# Allegro board nrf9160_0708.brd
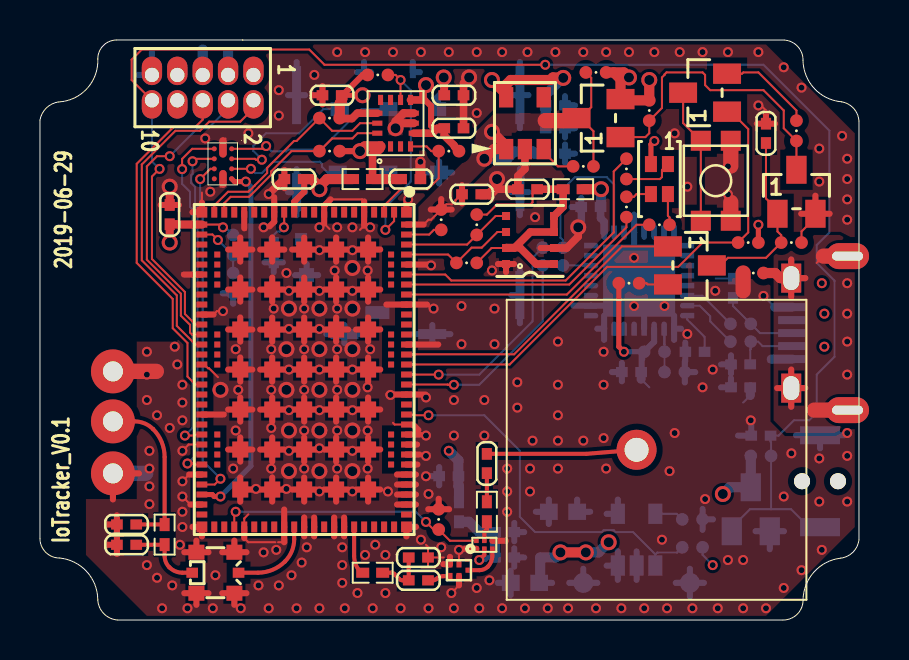
[diagram p0: board, top side]
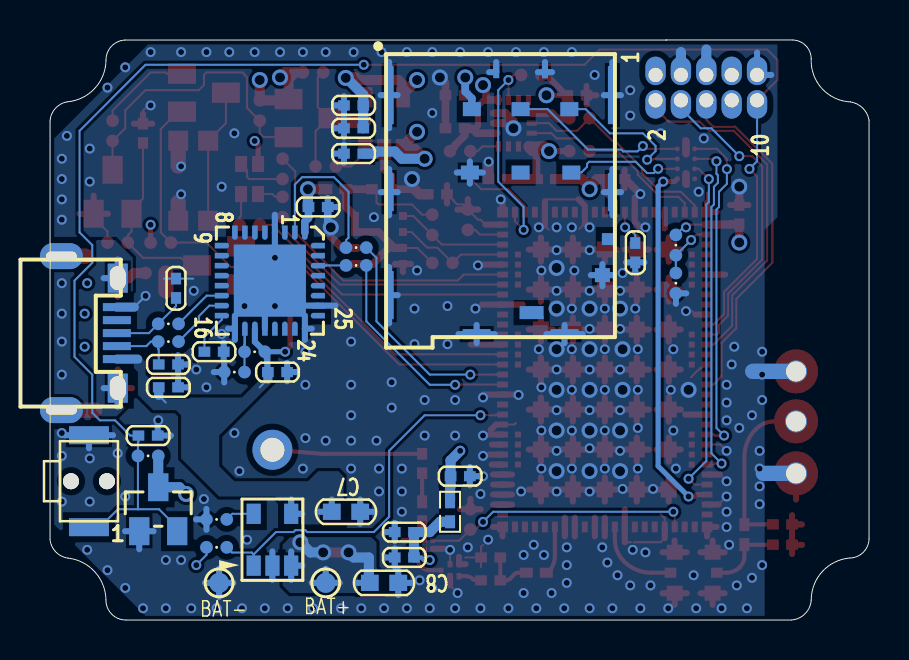
[diagram p1: board, bottom side, seen from below]

Outline 40.99 x 29 mm; copper layers: TOP, L2GND, L3PWR, BOTTOM. Coordinates in mm from the lower left corner of the outline.
Outline path: 0,24.99 0,4.08 arc(0.29,3.39) 0.98,3.1 arc(2.34,2.42) 2.89,1 arc(3.2,0.32) 3.88,0 37.19,0 arc(37.9,0.29) 38.19,1.01 arc(38.75,2.4) 40.08,3.09 arc(40.7,3.39) 40.99,4.01 40.99,24.95 arc(40.73,25.59) 40.12,25.91 arc(38.76,26.58) 38.19,27.99 arc(37.92,28.68) 37.25,29 10.15,29 10.15,29 3.84,29 arc(3.17,28.73) 2.9,28.06 arc(2.36,26.57) 0.92,25.91 arc(0.31,25.6) 0,24.99

## Design rules (mm)
net group LED_B: nets LED_B N97235328
net group LED_G: nets LED_G N97235326
net group LED_R: nets LED_R N97235316
net group N97220212: nets N97220212 N97220790
net group N97221138: nets N97221138 N97221234

## Placement (name value [footprint] x y rotation side)
ANT1  -  [GPS-15X15X2]  29.86 8.51 90 top
BAT+1  TP  [TP_SMD___0MM]  27.2 1.86 180 bottom
BAT-1  TP  [TP_SMD___0MM]  32.53 1.86 180 bottom
C1  1uF  [C0402]  27.58 20.65 180 bottom
C2  1uF  [C0402]  32.78 13.41 180 bottom
C3  4.7uF  [C0402]  25.8 23.32 0 bottom
C4  33nF  [C0402]  25.8 24.59 0 bottom
C5  4.7uF  [C0402]  25.8 25.73 0 bottom
C6  4.7uF  [C0402]  36.34 24.34 90 top
C7  10uF  [C0603]  26.18 5.41 180 bottom
C8  10uF  [C0603]  24.27 1.86 180 bottom
C9  100pF  [C0402]  20.46 7.19 180 bottom
C10  1uF  [C0402]  23.26 4.4 0 bottom
C11  33nF  [C0402]  23.26 3.13 0 bottom
C12  4.7uF  [C0402]  21.61 21.29 0 top
C13  47pF  [C0402]  18.94 1.98 0 top
C14  47pF  [C0402]  22.37 7.83 90 top
C15  2.2pF  [C0402]  18.94 3.13 0 top
C16  4.7uF  [C0402]  12.72 22.05 180 top
C17  4.7uF  [C0402]  11.7 18.37 270 bottom
C18  NC  [C0402]  4.34 3.76 180 top
C19  NC  [C0402]  4.34 4.78 180 top
C20  4.7uF  [C0402]  6.49 20.27 90 top
C21  10nF  [C0402]  20.72 26.24 0 top
C22  100nF  [C0402]  24.4 21.54 180 top
C23  2.2uF  [C0402]  14.62 26.24 180 top
C24  10nF  [C0402]  20.72 24.59 0 top
C25  100nF  [C0402]  18.56 22.05 0 top
C26  1uF  [C0402]  29.61 12.4 180 bottom
C27  100pF  [C0402]  35.07 11.64 180 bottom
D1  BAT54C  [SOT-23]  32.53 17.73 270 top
D2  BAT54C  [SOT-23]  33.29 26.37 90 top
D3  RGB-0603  [LED4_1P6X1P5MM_SMT]  31.01 22.05 0 top
D4  -  [CM1402]  9.16 22.81 270 top
DVI1  -  [DVI]  3.65 9.93 0 top
DVI2  -  [DVI]  3.65 12.43 0 top
DVI3  -  [DVI]  3.65 7.33 0 top
J1  micro  [MICROUSB_5P_4DIP]  40.42 14.35 270 bottom
J2  -  [SF72S006VBAR2500]  24.02 28.15 0 bottom
J3  HDR 2X5  [HDR_5X2_FTSH_TH]  10.69 27.26 270 top
J4  MM8130-2600  [COAXIAL-SWF]  8.78 2.36 270 top
L1  100M/600R  [L0402]  20.97 5.41 270 bottom
L2  9.1nH  [L0402]  16.65 2.36 0 top
L3  6.8nH  [L0402]  22.37 5.41 90 top
L4  1.5nH  [L0402]  6.24 4.27 90 top
L5  100M/600R  [L0402]  26.69 21.54 0 top
L6  100M/600R  [L0402]  16.15 22.05 0 top
Q1  AO3401  [SOT-23]  27.96 25.1 90 top
Q2  AO3400  [SOT-23]  37.86 21.41 0 top
R1  0  [RC0402_25]  35.7 17.35 180 top
R2  10K  [RC0402_25]  31.77 12.4 0 bottom
R3  4.7K  [RC0402_25]  30.75 13.41 0 bottom
R4  33  [RC0402_25]  25.67 17.73 180 bottom
R5  33  [RC0402_25]  25.67 18.62 180 bottom
R6  0  [RC0402_25]  27.83 27.38 180 top
R7  33  [RC0402_25]  35.07 14.81 180 bottom
R8  33  [RC0402_25]  35.07 13.92 180 bottom
R9  100K  [RC0402_25]  30.5 25.48 270 top
R10  100K  [RC0402_25]  27.2 22.68 180 top
R11  1M  [RC0402_25]  37.61 18.87 0 top
R12  10K  [RC0402_25]  37.86 24.46 90 top
R13  33  [RC0402_25]  29.48 16.84 0 top
R14  10K  [RC0402_25]  35.45 18.87 0 top
R15  100K  [RC0402_25]  32.66 3.63 180 bottom
R16  270  [RC0402_25]  29.35 22.56 270 top
R17  180  [RC0402_25]  31.01 19.76 180 top
R18  180  [RC0402_25]  29.35 20.65 270 top
R19  1.5K  [RC0402_25]  32.66 5.03 0 bottom
R20  10K  [RC0402_25]  36.09 8.21 180 bottom
R21  10K  [RC0402_25]  20.08 20.02 90 top
R22  100K  [RC0402_25]  19.96 5.03 270 top
R23  10K  [RC0402_25]  9.67 18.75 90 bottom
R24  10K  [RC0402_25]  9.67 16.84 270 bottom
R25  10K  [RC0402_25]  16.91 27.26 0 top
R26  10K  [RC0402_25]  20.46 23.45 180 top
R27  4.7K  [RC0402_25]  14.5 23.45 180 top
R28  4.7K  [RC0402_25]  14.5 25.1 180 top
R29  4.7K  [RC0402_25]  21.86 19.76 270 top
R30  4.7K  [RC0402_25]  21.35 17.86 180 top
SW1  EVQ-PE105K  [JX-03-03]  39.04 6.94 270 bottom
SW2  SPST PB  [3X3_5_SW]  33.83 21.96 270 top
U1  FT232RQ  [QFN32_S142EP]  29.99 16.97 270 bottom
U2  RP118N301B  [SOT23-5]  24.27 24.84 0 top
U3  XC5071  [SOT23-5]  29.86 4.02 180 bottom
U4  ME083A263X  [SOT-23]  35.58 5.54 180 bottom
U5  nRF9160_0  [NRF9160_DEV2_MODULE_A]  13.23 12.52 270 top
U6  SAFEB1G57  [FILTER-5P-GPS]  20.97 2.49 180 top
U7  -  [BGA524N6]  22.24 3.76 270 top
U8  ICM-42605  [LGA_14_0P8_3X2P5]  17.8 24.84 90 top
U9  BME680  [LGA_8_0P8_3X3]  24.53 19 180 top
VC1  ESD  [C0402]  34.69 16.59 270 bottom
VC2  ESD  [C0402]  35.07 12.78 0 bottom
VC3  ESD  [C0402]  36.09 9.22 0 bottom

## Library data of the parts
ANT1 = GPS-15X15X2
BAT+1 BAT-1 = TP
C1-C27 = CAP_NP: tolerance: 10%; signal model: DEFAULT_CAPACITOR_100000pF_2_1
D1 D2 = ZDC833/SOT_0
D3 = CLV1A_LED_4P
D4 = CM1402
DVI1-DVI3 = DVI
J1 = ZX62RD-AB-5P8_USB_MICROAB_0
J2 = SF72S006VBAR2500_1
J3 = CONN_HDR_5X2
J4 = Coaxial-Internal-SW_3
L1-L6 = INDUCTOR: tolerance: 20%
Q1 = PWRMOSFET_EP_DGS_0
Q2 = 2N1069_0
R1-R15 R19-R30 = RES
R16-R18 = RES: tolerance: 5%; signal model: DEFAULT_RESISTOR_10000OHM_2_1
SW1 = SW2P_0
SW2 = ELTSA-63K-H_0
U1 = FT232R_0
U2 = RP118N301B
U3 = XC5071_0
U4 = ME083A263X
U5 = nRF9160_0
U6 = SAFEB1G57
U7 = BGA524N6
U8 = ICM-42605
U9 = BME680
VC1-VC3 = ESD

## Footprints (pads in the part's own frame, mm; a bottom-side part is the same pattern mirrored in y, then rotated)
3X3_5_SW
  rect 1x1 smd: 1(-2,-0.75) 2(2,-0.75) 3(2,0.75) 4(-2,0.75)
BGA524N6
  rect 0.23x0.23 smd: 1(0.2,-0.4) 2(0.2,0) 3(0.2,0.4) 4(-0.2,0.4) 5(-0.2,0) 6(-0.2,-0.4)
C0402
  rect 0.584x0.508 smd: 1(-0.483,0) 2(0.483,0)
C0603
  rect 0.889x0.813 smd: 1(-0.711,0) 2(0.711,0)
CM1402
  round 0.25 smd: A1(-0.75,0.435) A2(-0.25,0.435) A3(0.25,0.435) A4(0.75,0.435) B1(-0.5,0) B2(0.5,0) C1(-0.75,-0.435) C2(-0.25,-0.435) C3(0.25,-0.435) C4(0.75,-0.435)
COAXIAL-SWF
  rect 0.5x0.58 smd: 1(0,1.16) 2(0,-1.16)
  rect 0.75x0.8 smd: 3(-1.025,0.95) 4(-1.025,-0.95) 5(1.025,-0.95) 6(1.025,0.95)
DVI
  round 2.2 hole 1: 1(0,0)
FILTER-5P-GPS
  rect 0.25x0.25 smd: 1(-0.45,0)
  rect 0.25x0.325 smd: 2(0,-0.3) 3(0.45,-0.3) 4(0.45,0.3) 5(0,0.3)
GPS-15X15X2
  round 2 hole 1.2: 1(0,0)
HDR_5X2_FTSH_TH
  oval 1.422x1.016 hole 0.711: 1(0,0) 2(1.27,0) 3(0,-1.27) 4(1.27,-1.27) 5(0,-2.54) 6(1.27,-2.54) 7(0,-3.81) 8(1.27,-3.81) 9(0,-5.08) 10(1.27,-5.08)
JX-03-03
  round 0.8 hole 0.8 unplated: (0,-0.9) (0,0.9)
  rect 0.9x2 smd: 1(-2.3,0) 2(2.3,0)
L0402
  rect 0.65x0.5 smd: 1(-0.5,0) 2(0.5,0)
LED4_1P6X1P5MM_SMT
  rect 0.6x0.8 smd: 1(0.425,0.75) 2(-0.425,0.75) 3(-0.425,-0.75) 4(0.425,-0.75)
LGA_8_0P8_3X3
  rect 0.4x0.4 smd: 1(1.2,1.2) 2(1.2,0.4) 3(1.2,-0.4) 4(1.2,-1.2) 5(-1.2,-1.2) 6(-1.2,-0.4) 7(-1.2,0.4) 8(-1.2,1.2)
LGA_14_0P8_3X2P5
  rect 0.508x0.254 smd: 1(-1.163,0.75) 2(-1.163,0.25) 3(-1.163,-0.25) 4(-1.163,-0.75) 8(1.163,-0.75) 9(1.163,-0.25) 10(1.163,0.25) 11(1.163,0.75)
  rect 0.254x0.508 smd: 5(-0.5,-0.913) 6(0,-0.913) 7(0.5,-0.913) 12(0.5,0.913) 13(0,0.913) 14(-0.5,0.913)
MICROUSB_5P_4DIP
  rect 0.4x1.4 smd: 1(1.3,2.775) 2(0.65,2.775) 3(0,2.775) 4(-0.65,2.775) 5(-1.3,2.775)
  rect 1.45x1 hole 1.2x0.8: 6(2.75,2.82) 9(-2.75,2.82)
  oval 1.3x2.15 hole 0.45x1.55: 7(3.85,0) 8(-3.85,0)
NRF9160_DEV2_MODULE_A
  rect 0.54x0.54 smd: 1(-7.87,5.12) 21(-7.87,-5.12) 52(7.87,-5.12) 72(7.87,5.12)
  rect 0.54x0.3 smd: 2(-7.87,4.5) 3(-7.87,4) 4(-7.87,3.5) 5(-7.87,3) 6(-7.87,2.5) 7(-7.87,2) 8(-7.87,1.5) 9(-7.87,1) 10(-7.87,0.5) 11(-7.87,0) 12(-7.87,-0.5) 13(-7.87,-1) 14(-7.87,-1.5) 15(-7.87,-2) 16(-7.87,-2.5) 17(-7.87,-3) 18(-7.87,-3.5) 19(-7.87,-4) 20(-7.87,-4.5) 53(7.87,-4.5) 54(7.87,-4) 55(7.87,-3.5) 56(7.87,-3) 57(7.87,-2.5) 58(7.87,-2) 59(7.87,-1.5) 60(7.87,-1) 61(7.87,-0.5) 62(7.87,0) 63(7.87,0.5) 64(7.87,1) 65(7.87,1.5) 66(7.87,2) 67(7.87,2.5) 68(7.87,3) 69(7.87,3.5) 70(7.87,4) 71(7.87,4.5)
  rect 0.3x0.54 smd: 22(-7.25,-5.12) 23(-6.75,-5.12) 24(-6.25,-5.12) 25(-5.75,-5.12) 26(-5.25,-5.12) 27(-4.75,-5.12) 28(-4.25,-5.12) 29(-3.75,-5.12) 30(-3.25,-5.12) 31(-2.75,-5.12) 32(-2.25,-5.12) 33(-1.75,-5.12) 34(-1.25,-5.12) 35(-0.75,-5.12) 36(-0.25,-5.12) 37(0.25,-5.12) 38(0.75,-5.12) 39(1.25,-5.12) 40(1.75,-5.12) 41(2.25,-5.12) 42(2.75,-5.12) 43(3.25,-5.12) 44(3.75,-5.12) 45(4.25,-5.12) 46(4.75,-5.12) 47(5.25,-5.12) 48(5.75,-5.12) 49(6.25,-5.12) 50(6.75,-5.12) 51(7.25,-5.12) 73(7.25,5.12) 74(6.75,5.12) 75(6.25,5.12) 76(5.75,5.12) 77(5.25,5.12) 78(4.75,5.12) 79(4.25,5.12) 80(3.75,5.12) 81(3.25,5.12) 82(2.75,5.12) 83(2.25,5.12) 84(1.75,5.12) 85(1.25,5.12) 86(0.75,5.12) 87(0.25,5.12) 88(-0.25,5.12) 89(-0.75,5.12) 90(-1.25,5.12) 91(-1.75,5.12) 92(-2.25,5.12) 93(-2.75,5.12) 94(-3.25,5.12) 95(-3.75,5.12) 96(-4.25,5.12) 97(-4.75,5.12) 98(-5.25,5.12) 99(-5.75,5.12) 100(-6.25,5.12) 101(-6.75,5.12) 102(-7.25,5.12)
  rect 0.8x0.8 smd: 103(-4,3.2) 103/2(-6,1.6) 103/3(-2,1.6) 103/4(-4,-3.2) 103/5(-4,0) 103/6(-4,1.6) 103/7(6,-3.2) 103/8(2,3.2) 103/9(6,-1.6) 103/10(6,0) 103/11(4,-3.2) 103/12(6,1.6) 103/13(4,-1.6) 103/14(4,0) 103/15(4,3.2) 103/16(4,1.6) 103/17(-6,-3.2) 103/18(0,-3.2) 103/19(0,0) 103/20(-6,0) 103/21(0,1.6) 103/22(0,-1.6) 103/23(2,-3.2) 103/24(0,3.2) 103/25(2,0) 103/26(6,3.2) 103/27(2,1.6) 103/28(2,-1.6) 103/29(-2,-3.2) 103/30(-6,-1.6) 103/31(-2,-1.6) 103/32(-2,0) 103/33(-6,3.2) 103/34(-2,3.2) 103/35(-4,-1.6)
  rect 0.3x0.3 smd: 104(-5.75,-4.35) 105(-5.25,-4.35) 106(-4.75,-4.35) 107(-4.25,-4.35) 108(-1.75,-4.35) 109(-1.25,-4.35) 110(-0.75,-4.35) 111(-0.25,-4.35) 112(3.25,-4.35) 113(3.75,-4.35) 114(4.25,-4.35) 115(4.75,-4.35) 116(4.75,4.35) 117(4.25,4.35) 118(3.75,4.35) 119(3.25,4.35) 120(-0.25,4.35) 121(-0.75,4.35) 122(-1.25,4.35) 123(-1.75,4.35) 124(-4.25,4.35) 125(-4.75,4.35) 126(-5.25,4.35) 127(-5.75,4.35)
QFN32_S142EP
  custom 0.711x0.279 smd: 1(-2.4,1.751) 2(-2.4,1.251) 3(-2.4,0.751) 4(-2.4,0.25) 5(-2.4,-0.25) 6(-2.4,-0.751) 7(-2.4,-1.251) 8(-2.4,-1.751) 17(2.4,-1.751) 18(2.4,-1.251) 19(2.4,-0.751) 20(2.4,-0.25) 21(2.4,0.25) 22(2.4,0.751) 23(2.4,1.251) 24(2.4,1.751)
  custom 0.279x0.711 smd: 9(-1.751,-2.4) 10(-1.251,-2.4) 11(-0.751,-2.4) 12(-0.25,-2.4) 13(0.25,-2.4) 14(0.751,-2.4) 15(1.251,-2.4) 16(1.751,-2.4) 25(1.751,2.4) 26(1.251,2.4) 27(0.751,2.4) 28(0.25,2.4) 29(-0.25,2.4) 30(-0.751,2.4) 31(-1.251,2.4) 32(-1.751,2.4)
  rect 3.607x3.607 smd: 33(0,0)
RC0402_25
  round 0.635 smd: 1(-0.508,0) 2(0.508,0)
SF72S006VBAR2500
  rect 1.4x0.5 smd: 1(-4.38,13.85) 2(-8.78,13.85)
  rect 0.75x0.7 smd: 3(-10.675,10.9)
  rect 0.45x2.9 smd: 4(0,1.9) 5(-11.175,1.9)
  rect 0.45x2.4 smd: 6(0,11.9)
  rect 0.45x1.9 smd: 7(-11.175,6.75) 8(0,6.75)
  rect 0.3x0.6 smd: 9(-5.36,0.75) 10(-7.8,0.75)
  rect 0.9x0.7 smd: C1(-4.14,2.6) C2(-6.58,2.6) C3(-9.02,2.6) C5(-4.04,5.77) C6(-6.58,5.77) C7(-9.12,5.77)
  rect 0.6x0.6 smd: CSW(-10.95,9.1)
  rect 1.2x0.65 smd: DSW(-7.13,12.775)
SOT23-5
  rect 0.711x1.016 smd: 1(-0.94,-1.295) 2(0,-1.295) 3(0.94,-1.295) 4(0.94,1.295) 5(-0.94,1.295)
SOT-23
  rect 1.016x1.397 smd: 1(-0.95,-1.1) 2(0.95,-1.1) 3(0,1.1)
TP_SMD___0MM
  round 1 smd: 1(0,0)

## Nets
GND: BAT-1.1 C1.2 C2.2 C3.2 C4.2 C5.2 C6.2 C7.2 C8.2 C9.2 C10.2 C11.2 C12.2 C15.2 C16.2 C17.2 C18.2 C19.2 C20.2 C21.2 C22.2 C23.2 C24.2 C25.2 C26.2 C27.2 D4.B1(GND1) D4.B2(GND2) DVI2.1(D) DVI3.1(D) J1.5(P5) J2.1(S1) J2.2(S2) J2.3(S3) J2.4(S4) J2.5(S5) J2.6(S6) J2.7(S7) J2.8(S8) J2.9(S9) J2.10(S10) J2.C5(GND) J3.3(A2) J3.5(A3) J3.9(A5) J4.3(SHIELD) J4.4(S2) J4.5(S1) J4.6(S3) Q2.2(E) R1.2 R2.2 R11.2 R19.2 R22.1 R24.2 SW1.1(COMMON) SW2.3 SW2.4 U1.4(GND_4) U1.17(GND_17) U1.20(GND_20) U1.24(AGND) U1.26(TEST) U1.33(EPAD) U2.2(GND) U3.2(GND) U4.1(GND) U5.1(GND1) U5.5(GND2) U5.9(GND3) U5.14(GND4) U5.17(GND5) U5.21(GND6) U5.27(GND7) U5.31(GND8) U5.36(GND9) U5.41(GND10) U5.44(GND11) U5.47(GND12) U5.50(GND13) U5.52(GND14) U5.56(GND15) U5.60(GND16) U5.62(GND17) U5.63(GND18) U5.65(GND19) U5.66(GND20) U5.72(GND21) U5.74(GND22) U5.75(GND23) U5.76(GND24) U5.77(GND25) U5.78(GND26) U5.79(GND27) U5.80(GND28) U5.81(GND29) U5.82(GND30) U5.85(GND31) U5.90(GND32) U5.94(GND33) U5.98(GND34) U5.103(GND35) U5.103/2(GND36) U5.103/3(GND37) U5.103/4(GND38) U5.103/5(GND39) U5.103/6(GND40) U5.103/7(GND41) U5.103/8(GND42) U5.103/9(GND43) U5.103/10(GND44) U5.103/11(GND45) U5.103/12(GND46) U5.103/13(GND47) U5.103/14(GND48) U5.103/15(GND49) U5.103/16(GND50) U5.103/17(GND51) U5.103/18(GND52) U5.103/19(GND53) U5.103/20(GND54) U5.103/21(GND55) U5.103/22(GND56) U5.103/23(GND57) U5.103/24(GND58) U5.103/25(GND59) U5.103/26(GND60) U5.103/27(GND61) U5.103/28(GND62) U5.103/29(GND63) U5.103/30(GND64) U5.103/31(GND65) U5.103/32(GND66) U5.103/33(GND67) U5.103/34(GND68) U5.103/35(GND69) U6.2(GND1) U6.3(GND2) U6.5(GND3) U7.1(GND1) U7.4(GND2) U8.6(GND) U8.7(RESV3) U9.1(GND1) U9.7(GND2) VC1.1 VC2.1 VC3.1
VBAT: BAT+1.1 C8.1 Q1.2(SOURCE) R6.1 R9.1 R15.1 U3.3(BAT)
VDD_3V: C1.1 C4.1 C5.1 C9.1 C16.1 D3.2(COMMON_A) J3.1(A1) L1.1 L5.2 L6.1 R14.2 R20.2 U1.1(VCCIO) U2.5(VOUT) U4.3(VCC) U5.12(VDD_GPIO)
CHRQ: R15.2 U3.1(/CHRQ) U5.83(P0.26)
GPS_EN: R22.2 U5.55(MAGPIO0) U7.6(PON)
INT1: R26.2 U5.3(P0.06) U8.4(INT1/INT)
INT2: R25.2 U5.2(P0.05) U8.9(INT2/FSYNC)
LED_B: R18.2 U5.96(P0.01)
LED_G: R17.2 U5.95(P0.00)
LED_R: R16.1 U5.97(P0.02)
NRESET: J3.10(B5) R20.1 SW1.2(NO) U4.2(/RESET) U5.32(NRESET) VC3.2
POWER_KEY: D2.1(C1) R14.1 U5.88(P0.30)
POWER_ON: D1.1(C1) U5.89(P0.31)
RXD: R5.2 U5.87(P0.29)
SCL0: R29.2 U5.100(P0.04) U9.4(SCK)
SCL1: R28.2 U5.20(P0.12) U8.13(SCL/SCLK)
SDA0: R30.2 U5.99(P0.03) U9.3(SDI)
SDA1: R27.2 U5.19(P0.11) U8.14(SDA/SDIO/SDI)
SWD_CLK: J3.4(B2) U5.33(SWD_CLK)
SWD_IO: J3.2(B1) U5.34(SWD_IO)
SWDO: J3.6(B3) U5.38(P0.22)
TXD: R4.2 U5.86(P0.28)
VSYS: C3.1 C12.1 C20.1 Q1.3(DRAIN) R6.2 R10.1 R21.2 R23.2 U2.1(VIN) U5.22(VDD2) U5.102(VDD1)
VUSB_5V: C7.1 C26.1 C27.1 J1.1(P1) R3.1 R13.1 U1.19(VCC5I) U3.4(VCC)
N97219341: C10.1 C11.1 L1.2 U7.2(VCC)
N97219363: J1.3(P3) R7.1 VC1.2
N97219365: J1.2(P2) R8.1 VC2.2
N97219367: R8.2 U1.15(USBDM)
N97219373: R7.2 U1.14(USBDP)
N97219417: C17.1 U5.13(IO_SUPPLY)
N97219583: C23.1 C24.1 C25.1 L6.2 R25.1 R26.1 R27.1 R28.1 U8.1(SDO/AD0) U8.5(VDDIO) U8.8(VDD) U8.12(CS)
N97219715: J4.1(IN) U5.61(ANT)
N97219761: C19.1 DVI1.1(D) L4.2
N97219817: R5.1 U1.2(RXD)
N97219819: R4.1 U1.30(TXD)
N97219843: C18.1 J4.2(OUT) L4.1
N97219851: C2.1 U1.16(VCC3O)
N97219873: R2.1 R3.2 U1.18(RESET#)
N97219883: L2.1 U5.67(GPS)
N97220028: R23.1 R24.1 U5.23(P0.13)
N97220114: R10.2 U2.3(CE)
N97220138: U6.1(IN) U7.3(OUT)
N97220140: C21.1 D4.A4(VCC) J2.C1(VSIM) U5.49(SMI_1V8)
N97220176: C22.1 L5.1 R29.1 R30.1 U9.2(CSB) U9.5(SDO) U9.6(VDDIO) U9.8(VDD)
N97220212: C13.1 C15.1 L2.2
N97220241: R19.1 U3.5(PROG)
N97220339: D2.3(A) SW2.1 SW2.2
N97220404: D2.2(C2) R12.2
N97220416: Q1.1(GATE) Q2.3(C) R9.2 R12.1
N97220523: D4.C1(RST_2) U5.43(SMI_RST)
N97220535: D4.C2(CLK_2) U5.46(SMI_CLK)
N97220539: D4.C3(DATA_2) U5.48(SMI_IO)
N97220553: D4.A1(RST_1) J2.C2(SIMRST)
N97220566: D4.A2(CLK_1) J2.C3(SIMCLK)
N97220568: D4.A3(DATA_1) J2.C7(SIMDATA)
N97220738: C6.1 D1.3(A) Q2.1(B) R11.1
N97220790: C13.2 U6.4(OUT)
N97220884: J1.6(SHLD3) J1.7(SHLD1) J1.8(SHLD4) J1.9(SHLD2) R1.1
N97220965: D1.2(C2) R13.2
N97221136: L3.1 U7.5(IN)
N97221138: C14.1 L3.2
N97221234: ANT1.1(ANT) C14.2
N97221374: R21.1 U5.101(ENABLE)
N97235316: D3.1(RED_C) R16.2
N97235326: D3.4(GREEN_C) R17.1
N97235328: D3.3(BLUE_C) R18.1

Pads without a net: D4 C4; J1 4; J2 C6 CSW DSW; J3 7 8; U1 3 5 6 7 8 9 10 11 12 13 21 22 23 25 27 28 29 31 32; U2 4; U5 4 6 7 8 10 11 15 16 18 24 25 26 28 29 30 35 37 39 40 42 45 51 53 54 57 58 59 64 68 69 70 71 73 84 91 92 93 104 105 106 107 108 109 110 111 112 113 114 115 116 117 118 119 120 121 122 123 124 125 126 127; U8 2 3 10 11

## Via types
v1: diameter 0.8, hole 0.5, TOP to BOTTOM, 39 vias
v2: diameter 0.5, hole 0.3, TOP to BOTTOM, 263 vias

## Routing (per net, layer and track width the routed paths; a pad name or vN(x,y) marks a point on that pad's centre or on a via; arc(x,y) is an arc through that point)
GND: length 271.5
  TOP w0.102: 21.28,3.56 20.97,3.25 U6.2 ; 18.94,7.83 18.89,7.77 ; 17.34,15.77 17.29,15.83 ; 19.32,3.76 19.42,3.66 C15.2 ; C15.2 20.21,3.13 ; C15.2 19.42,2.64 ; v2(34.43,21.29) 34.43,20.99 34.53,20.89 34.58,20.89 ; 17.67,9.86 17.75,9.77 U5.82 18.67,9.77 ; 18.94,8.84 18.87,8.77 ; 14.54,21.03 16.12,21.03 16.23,20.93 ; 19.07,9.22 19.01,9.27 ; U5.36 8.23,12.77 8.41,12.59 8.46,12.59 8.91,12.14 ; 8.11,20.87 8.11,21.37 ; 11.78,3.89 10.43,3.89 10.23,4.09 ; 10.3,19.51 10.23,19.59 ; 11.92,3.89 12.23,3.89 ; 9.29,24.08 9.16,23.95 ; 36.34,25.31 36.34,25.48 36.09,25.73 ; 9.03,21.67 9.16,21.8 ; R11.2 38.12,19.43 38.81,20.12 Q2.2 ; v2(20.59,1.35) 20.97,1.73 ; U5.56 10.23,5.08 10.43,5.29 ; 19.07,8.21 19,8.27 ; 18.34,20.95 v2(18.43,21.03) ; 16.02,19.51 16.23,19.72 ; 8.69,15.27 8.86,15.45 v2(9.16,15.45) ; U5.9 14.23,20.72 ; v2(7.13,6.94) 7.47,7.27 ; 14.5,19.55 14.23,19.82 ; U5.44 7.44,8.77 v2(7.13,8.46) ; 7.13,17.35 7.2,17.27 ; 23.39,3.89 23.31,3.96 ; 19.58,15.57 19.37,15.77 ; 9.29,10.37 9.2,10.27 ; 34.43,22.56 34.58,22.7 ; v2(7.13,6.17) 7.53,5.77
  TOP w0.305: 12.62,18.52 U5.103/20 ; U5.103/20 13.23,19.13 ; U5.103/20 13.23,17.92 ; U5.103/20 13.83,18.52 ; 13.23,7.92 U5.103/14 ; U5.103/14 12.62,8.52 ; U5.103/14 13.83,8.52 ; U5.103/14 13.23,9.13 ; 7.2,17.27 U5.27 ; 16.42,17.92 U5.103/33 ; U5.103/33 16.42,19.13 ; U5.103/33 17.03,18.52 ; U5.103/33 15.82,18.52 ; U5.103/9 12.23,6.52 ; U5.103/9 11.63,5.92 ; U5.103/9 11.02,6.52 ; U5.103/9 11.63,7.13 ; 20.97,1.73 U6.5 ; C6.2 36.34,25.31 ; C6.2 35.88,24.82 ; C6.2 36.8,24.82 ; 18.82,5.77 U5.74 17.87,5.77 ; 10.03,15.92 U5.103/4 ; U5.103/4 10.63,16.52 ; U5.103/4 10.03,17.13 ; U5.103/4 9.42,16.52 ; 14.22,16.52 U5.103/6 ; U5.103/6 15.43,16.52 ; U5.103/6 14.82,17.13 ; U5.103/6 14.82,15.92 ; 14.22,18.52 U5.103/2 ; U5.103/2 14.82,17.92 ; U5.103/2 15.43,18.52 ; U5.103/2 14.82,19.13 ; U5.103/30 12.23,18.52 ; U5.103/30 11.02,18.52 ; U5.103/30 11.63,17.92 ; U5.103/30 11.63,19.13 ; 11.02,14.52 U5.103/31 ; U5.103/31 11.63,15.13 ; U5.103/31 11.63,13.92 ; U5.103/31 12.23,14.52 ; 22.92,17.8 U9.1 ; U9.1 23.33,17.4 ; U9.1 23.73,17.8 ; 10.03,7.92 U5.103/11 ; U5.103/11 10.03,9.13 ; U5.103/11 9.42,8.52 ; U5.103/11 10.63,8.52 ; 14.82,9.92 U5.103/27 ; U5.103/27 14.22,10.52 ; U5.103/27 14.82,11.13 ; U5.103/27 15.43,10.52 ; 12.62,6.52 U5.103/10 ; U5.103/10 13.23,5.92 ; U5.103/10 13.23,7.13 ; U5.103/10 13.83,6.52 ; 18.87,8.77 U5.80 ; U5.103/21 15.43,12.52 ; U5.103/21 14.22,12.52 ; U5.103/21 14.82,11.92 ; U5.103/21 14.82,13.13 ; 10.03,5.92 U5.103/7 ; U5.103/7 10.63,6.52 ; U5.103/7 10.03,7.13 ; 10.23,4.09 U5.56 ; 18.89,7.77 U5.78 ; 16.42,9.92 U5.103/8 ; U5.103/8 15.82,10.52 ; U5.103/8 17.03,10.52 ; U5.103/8 16.42,11.13 ; 14.82,5.92 U5.103/12 ; U5.103/12 14.22,6.52 ; U5.103/12 14.82,7.13 ; U5.103/12 15.43,6.52 ; 20.19,2.79 U6.3 20.52,3.16 ; U5.103/28 12.23,10.52 ; U5.103/28 11.63,9.92 ; U5.103/28 11.02,10.52 ; U5.103/28 11.63,11.13 ; 9.42,12.52 U5.103/18 ; U5.103/18 10.63,12.52 ; U5.103/18 10.03,11.92 ; U5.103/18 10.03,13.13 ; 7.63,20.39 U5.21 8.11,20.87 ; U5.103 17.03,16.52 ; U5.103 16.42,15.92 ; U5.103 15.82,16.52 ; U5.103 16.42,17.13 ; 13.23,13.92 U5.103/32 ; U5.103/32 13.23,15.13 ; U5.103/32 12.62,14.52 ; U5.103/32 13.83,14.52 ; 14.23,20.72 14.54,21.03 ; 17.87,6.77 U5.76 18.82,6.77 ; 11.02,8.52 U5.103/13 ; U5.103/13 12.23,8.52 ; U5.103/13 11.63,7.92 ; U5.103/13 11.63,9.13 ; 12.23,3.89 U5.60 12.23,5.52 ; 10.03,9.92 U5.103/23 ; U5.103/23 10.03,11.13 ; U5.103/23 9.42,10.52 ; U5.103/23 10.63,10.52 ; U5.103/5 13.83,16.52 ; U5.103/5 13.23,15.92 ; U5.103/5 12.62,16.52 ; U5.103/5 13.23,17.13 ; 17.34,15.77 U5.94 19.37,15.77 ; 15.82,12.52 U5.103/24 ; U5.103/24 16.42,11.92 ; U5.103/24 17.03,12.52 ; U5.103/24 16.42,13.13 ; 38.1,20.31 Q2.2 ; Q2.2 38.81,21.22 ; Q2.2 39.52,20.31 ; U9.7 25.06,18.6 ; 12.23,21.59 C16.2 12.23,22.51 ; 14.82,7.92 U5.103/16 ; U5.103/16 14.82,9.13 ; U5.103/16 15.43,8.52 ; U5.103/16 14.22,8.52 ; 14.73,5.13 U5.65 14.73,4.18 ; 15.82,8.52 U5.103/15 ; U5.103/15 17.03,8.52 ; U5.103/15 16.42,9.13 ; U5.103/15 16.42,7.92 ; R22.1 19.96,6.06 ; R22.1 20.48,5.54 ; R22.1 19.43,5.54 ; 6.04,20.75 C20.2 6.95,20.75 ; 13.23,9.92 U5.103/25 ; U5.103/25 12.62,10.52 ; U5.103/25 13.23,11.13 ; U5.103/25 13.83,10.52 ; 7.23,1.34 J4.5 ; J4.5 8.43,1.34 ; J4.5 7.83,0.76 ; U5.103/35 11.63,17.13 ; U5.103/35 12.23,16.52 ; U5.103/35 11.63,15.92 ; U5.103/35 11.02,16.52 ; 3.85,3.3 C18.2 ; C18.2 3.85,4.22 ; C18.2 3.36,3.76 ; 18.82,7.27 U5.77 17.87,7.27 ; 12.62,12.52 U5.103/19 ; U5.103/19 13.23,11.92 ; U5.103/19 13.83,12.52 ; U5.103/19 13.23,13.13 ; 18.94,9.5 18.67,9.77 ; 14.23,19.82 U5.9 ; 11.49,19.68 11.73,19.91 U5.14 11.73,21.14 ; U5.103/34 17.03,14.52 ; U5.103/34 16.42,15.13 ; U5.103/34 16.42,13.92 ; U5.103/34 15.82,14.52 ; 16.23,20.93 U5.5 16.23,19.72 ; 9.42,18.52 U5.103/17 ; U5.103/17 10.63,18.52 ; U5.103/17 10.03,19.13 ; U5.103/17 10.03,17.92 ; 7.47,7.27 U5.47 ; 17.87,6.27 U5.75 18.82,6.27 ; 7.23,3.39 J4.4 ; J4.4 8.43,3.39 ; J4.4 7.83,3.97 ; 23.31,3.96 U7.4 ; 14.82,13.92 U5.103/3 ; U5.103/3 14.22,14.52 ; U5.103/3 15.43,14.52 ; U5.103/3 14.82,15.13 ; 10.03,13.92 U5.103/29 ; U5.103/29 9.42,14.52 ; U5.103/29 10.03,15.13 ; U5.103/29 10.63,14.52 ; 10.23,19.59 U5.17 ; 7.63,4.65 U5.52 8.11,4.18 ; 13.23,4.18 U5.62 13.23,5.13 ; 15.82,6.52 U5.103/26 ; U5.103/26 17.03,6.52 ; U5.103/26 16.42,7.13 ; U5.103/26 16.42,5.92 ; 15.23,4.18 U5.66 15.23,5.13 ; 3.36,4.78 C19.2 ; C19.2 3.85,5.24 ; C19.2 3.85,4.32 ; 18.34,4.18 U5.72 18.82,4.65 ; 9.2,10.27 U5.41 ; U7.1 21.28,3.56 ; C23.2 14.14,26.7 ; C23.2 13.64,26.24 ; C23.2 14.14,25.78 ; 11.02,12.52 U5.103/22 ; U5.103/22 11.63,11.92 ; U5.103/22 12.23,12.52 ; U5.103/22 11.63,13.13 ; 9.13,3.39 J4.3 ; J4.3 9.73,3.97 ; J4.3 10.33,3.39 ; U5.98 19.53,17.77 ; J4.6 10.33,1.34 ; J4.6 9.13,1.34 ; J4.6 9.73,0.76 ; 7.53,5.77 U5.50 ; U5.1 18.34,20.95 ; 4.96,7.33 DVI3.1 3.65,6.03 ; U5.31 8.69,15.27 ; U5.90 19.94,13.77 ; 19,8.27 U5.79 ; 19.3,11.27 U5.85 17.44,11.27 ; 13.72,5.13 U5.63 13.72,4.18 ; 19.01,9.27 U5.81
  TOP w0.381: v2(11.45,21.3) 12.2,22.05 C16.2 ; U9.7 26.37,18.6 26.94,19.17 v1(26.94,19.64) ; v1(21.48,27.13) 21.2,26.85 C21.2 C24.2 ; 9.16,23.95 D4.B1 ; 22.5,21.29 22.57,21.29 22.83,21.54 C22.2 23.92,22.2 24.27,22.56 U2.2 ; 9.16,21.8 D4.B2
  TOP w0.406: C20.2 v1(6.49,21.67) ; U8.6 18.05,24.84 v1(17.8,24.59) 17.8,24.94 18.2,25.34 U8.7
  TOP w0.508: C25.2 v2(19.04,22.91) ; C12.2 22.5,21.29 22.88,21.67 v1(22.88,22.05)
  TOP w0.762: R1.2 35.2,16.46 ; SW2.3 34.58,20.89 ; 34.58,22.7 SW2.4 ; DVI2.1 5.82,12.43
  BOTTOM w0.102: U1.33 v2(31.26,15.7) 31.74,15.22 ; U1.33 29.74,17.22 29.74,17.69 30.04,17.99 30.04,18.24 29.74,18.53 ; U1.33 28.24,15.22 ; 5.46,7.27 5.35,7.27 5.29,7.33 ; 35.3,17.07 VC1.1 33.82,17.07 ; 36.77,15.65 v2(36.21,16.21)
  BOTTOM w0.305: 24.02,14.84 J2.6 ; J2.6 24.02,17.65 ; J2.6 23.59,16.25 ; C11.2 23.74,3.58 ; C11.2 24.24,3.13 ; C11.2 23.74,2.67 ; SW1.1 40.25,9.24 ; SW1.1 37.84,9.24 ; SW1.1 39.04,8.59 ; C4.2 26.28,25.05 ; C4.2 26.28,24.13 ; C4.2 26.78,24.59 ; 4.89,27.26 5.61,27.26 5.61,28.37 ; J2.4 24.45,26.25 ; J2.4 24.02,24.59 ; J2.4 23.59,26.25 ; J2.4 24.02,27.9 ; C3.2 26.78,23.32 ; C3.2 26.28,23.78 ; C3.2 26.28,22.86 ; 9.15,16.33 R24.2 9.67,15.81 ; 35.6,9.96 VC3.1 34.94,9.22 ; 19.98,21.82 J2.C5 ; J2.C5 19.98,22.93 ; J2.C5 20.63,22.38 ; J2.C5 19.33,22.38 ; 28.63,12.4 C26.2 ; C26.2 29.13,12.86 ; C26.2 29.13,11.94 ; 29.74,18.53 U1.4 29.74,20.27 ; 32.3,13.87 C2.2 32.3,12.96 ; C5.2 26.28,26.19 ; C5.2 26.78,25.73 ; C5.2 26.28,25.28 ; 33.16,4.51 R19.2 ; R19.2 33.69,5.03 ; R19.2 33.16,5.55 ; 22.91,1.86 C8.2 ; C8.2 23.56,2.47 ; C8.2 23.56,1.25 ; 13.34,16.69 J2.3 ; J2.3 13.34,17.8 ; J2.3 13.92,17.25 ; J2.3 12.77,17.25 ; 35.82,4.44 U4.1 ; U4.1 36.53,3.54 ; U4.1 37.24,4.44 ; J2.7 13.27,21.4 ; J2.7 12.85,22.55 ; J2.7 12.42,21.4 ; J2.7 12.85,20.24 ; 26.6,20.65 C1.2 27.09,21.11 ; 27.89,14.57 U1.24 ; U1.24 28.24,15.22 ; U1.24 28.24,14.01 ; 25.47,4.8 C7.2 ; C7.2 25.47,6.02 ; C7.2 24.82,5.41 ; J2.10 16.22,27.9 ; J2.10 15.87,27.4 ; J2.10 16.57,27.4 ; C9.2 19.98,7.65 ; C9.2 19.49,7.19 ; C9.2 19.98,6.73 ; 18.66,27.9 J2.9 19.01,27.4 ; 29.86,3.43 U3.2 29.86,2.01 ; 24.02,20.24 J2.8 ; J2.8 23.59,21.4 ; J2.8 24.02,22.55 ; J2.8 24.45,21.4 ; C10.2 23.74,4.85 ; C10.2 23.74,3.94 ; C10.2 24.24,4.4 ; U1.17 31.74,15.22 ; U1.17 32.08,14.57 ; U1.17 31.74,14.01 ; J2.2 15.24,14.75 ; J2.2 15.24,13.84 ; J2.2 16.14,14.3 ; J2.2 14.34,14.3 ; 11.24,17.88 C17.2 ; C17.2 11.7,17.39 ; C17.2 12.16,17.88 ; R2.2 32.28,12.92 ; R2.2 32.28,11.88 ; R2.2 32.8,12.4 ; 12.42,26.25 J2.5 ; J2.5 12.85,27.9 ; J2.5 13.27,26.25 ; 31.83,1.86 BAT-1.1 ; BAT-1.1 32.53,2.56 ; BAT-1.1 33.23,1.86 ; BAT-1.1 32.53,1.15 ; 19.64,13.84 J2.1 ; J2.1 18.74,14.3 ; J2.1 20.54,14.3 ; J2.1 19.64,14.75 ; 28.74,15.72 U1.26 26.71,15.72 ; 34.09,12.78 VC2.1 ; VC2.1 34.59,13.24 ; VC2.1 34.59,12.32 ; 30.24,16.72 U1.20 ; 34.59,12.09 C27.2 34.09,11.64
  BOTTOM w0.381: v1(26.94,19.64) 27.09,19.79 C1.2
  BOTTOM w0.457: J1.5 36.77,15.65
  BOTTOM w0.508: J3.5 8.15,28.53 ; J3.3 9.42,28.4
  BOTTOM w0.762: DVI3.1 5.29,7.33 ; DVI2.1 5.82,12.43
  vias: v1(9.03,11.51) v1(12.34,13.54) v1(12.34,11.51) v1(12.46,15.57) v1(12.46,9.48) v1(12.46,7.44) v1(13.99,15.57) v1(13.99,13.54) v1(13.99,11.51) v1(13.99,9.48) v1(13.99,7.44) v1(15.64,17.6) v1(15.64,15.57) v1(15.64,13.54) v1(15.64,11.51) v1(15.64,9.48) v1(15.64,7.44) v2(5.35,13.41) v2(5.35,12.27) v2(5.35,11) v2(5.35,2.75) v2(5.48,8.46) v2(5.48,7.57) v2(5.48,6.68) v2(5.48,5.79) v2(5.86,10.24) v2(5.86,2.11) v2(6.11,0.59) v2(6.49,9.6) v2(6.62,1.73) v2(6.75,13.67) v2(6.88,12.78) v2(7,3.76) v2(7.13,11.76) v2(7.13,10.87) v2(7.13,9.98) v2(7.13,5.41) v2(7.13,4.65) v2(7.38,0.59) v2(8.27,24.08) v2(8.53,21.41) v2(8.65,0.59) v2(8.78,2.24) v2(9.67,7.57) v2(9.8,13.54) v2(9.8,9.48) v2(9.92,11.51) v2(10.05,0.59) v2(10.43,24.34) v2(10.81,6.56) v2(10.94,1.73) v2(11.19,19.64) v2(11.19,3.38) v2(11.45,0.59) v2(11.57,13.54) v2(11.57,11.51) v2(11.57,9.6) v2(11.57,7.57) v2(11.7,15.57) v2(11.83,3.51) v2(11.96,26.49) v2(11.96,25.22) v2(11.96,1.73) v2(12.34,17.35) v2(12.34,6.56) v2(12.46,16.46) v2(12.46,14.56) v2(12.46,12.52) v2(12.46,10.49) v2(12.46,8.46) v2(12.59,2.24) v2(12.84,0.59) v2(13.1,2.87) v2(13.23,15.57) v2(13.23,13.54) v2(13.23,11.51) v2(13.23,9.48) v2(13.23,7.57) v2(13.35,3.63) v2(13.73,27.26) v2(13.99,19.64) v2(13.99,18.49) v2(13.99,16.46) v2(13.99,14.56) v2(13.99,12.52) v2(13.99,10.49) v2(13.99,8.59) v2(13.99,6.43) v2(13.99,0.59) v2(14.75,17.48) v2(14.88,28.4) v2(14.88,19.64) v2(14.88,15.57) v2(14.88,13.54) v2(14.88,11.51) v2(14.88,9.48) v2(14.88,7.57) v2(15.13,3.63) v2(15.13,2.75) v2(15.13,1.86) v2(15.26,0.59) v2(15.64,19.64) v2(15.64,18.49) v2(15.64,16.46) v2(15.64,12.52) v2(15.64,10.49) v2(15.64,8.46) v2(15.64,6.43) v2(15.89,1.35) v2(16.27,28.4) v2(16.27,3.25) v2(16.4,17.48) v2(16.4,11.64) v2(16.4,9.48) v2(16.4,7.57) v2(16.53,19.64) v2(16.53,13.54) v2(16.65,0.59) v2(16.78,3.76) v2(17.29,3.25) v2(17.29,1.35) v2(17.42,6.43) v2(17.54,11.25) v2(17.67,28.4) v2(18.05,0.59) v2(19.07,28.4) v2(19.07,4.02) v2(19.32,11.13) v2(19.32,9.22) v2(19.32,8.21) v2(19.32,7.19) v2(19.45,6.3) v2(19.45,0.59) v2(19.58,17.73) v2(19.7,15.57) v2(20.08,3.63) v2(20.46,28.4) v2(20.72,11) v2(20.72,9.22) v2(20.72,0.59) v2(20.97,3.51) v2(21.1,15.7) v2(21.1,13.79) v2(21.86,28.4) v2(21.86,25.35) v2(21.86,1.6) v2(21.99,0.59) v2(22.24,11) v2(22.24,9.22) v2(22.5,1.98) v2(22.62,17.48) v2(22.75,15.57) v2(22.75,13.79) v2(23.13,28.4) v2(23.13,0.59) v2(23.39,7.57) v2(23.39,6.43) v2(23.39,5.41) v2(23.89,11.89) v2(23.89,10.62) v2(24.27,0.59) v2(24.4,28.4) v2(24.53,7.57) v2(24.53,6.43) v2(24.66,8.97) v2(24.78,20.14) v2(25.42,0.59) v2(25.8,28.4) v2(25.93,13.92) v2(25.93,11.76) v2(25.93,10.24) v2(25.93,8.97) v2(25.93,7.57) v2(26.43,0.59) v2(27.2,28.4) v2(27.2,8.97) v2(27.83,0.59) v2(28.21,13.41) v2(28.21,11.76) v2(28.21,9.1) v2(28.34,28.4) v2(28.34,7.57) v2(29.1,0.59) v2(29.48,28.4) v2(29.74,18.11) v2(29.74,15.7) v2(30.24,0.59) v2(30.75,28.4) v2(31.13,4.02) v2(31.39,0.59) v2(31.51,7.44) v2(31.77,24.34) v2(31.77,9.35) v2(32.02,28.4) v2(32.4,21.67) v2(32.4,14.3) v2(32.66,0.59) v2(33.16,28.4) v2(33.16,11.64) v2(33.29,6.05) v2(33.67,12.52) v2(33.8,16.46) v2(33.93,0.59) v2(34.43,28.4) v2(34.43,22.68) v2(34.43,3) v2(35.2,3) v2(35.2,0.59) v2(35.58,9.98) v2(35.96,28.4) v2(35.96,25.73) v2(36.34,0.59) v2(37.23,27.64) v2(37.23,6.17) v2(37.23,1.6) v2(37.61,8.33) v2(38.12,26.62) v2(38.12,2.49) v2(39.01,23.57) v2(39.01,21.92) v2(39.01,8.08) v2(39.01,5.92) v2(39.13,16.84) v2(39.13,3.51) v2(39.26,15.32) v2(39.26,13.67) v2(40.15,24.21) v2(40.4,23.07) v2(40.4,22.05) v2(40.4,21.03) v2(40.4,20.02) v2(40.4,9.35) v2(40.4,8.21) v2(40.4,5.92)
VBAT: length 16.7
  TOP w0.508: v1(29.48,27.13) 29.23,27.38 28.72,27.38 ; R6.1 28.72,27.38 ; 28.72,27.38 29.06,27.05 Q1.2 29.12,25.99 R9.1 v1(30.5,27) ; v1(26.05,3.38) v1(27.32,3.38)
  BOTTOM w0.102: R15.1 33.16,3.25 v2(33.67,2.75)
  BOTTOM w0.305: BAT+1.1 27.9,1.86 ; BAT+1.1 26.49,1.86 ; BAT+1.1 27.2,2.56 ; 25.63,1.86 24.99,1.86 24.99,2.47 ; U3.3 28.92,3.43 ; U3.3 28.36,2.72 ; U3.3 28.92,2.01
  BOTTOM w0.508: 24.99,1.86 25.04,1.91 25.04,3.13 25.8,3.13 v1(26.05,3.38) ; v1(28.47,3.89) 27.96,3.38 v1(27.32,3.38)
VDD_3V: length 25.9
  TOP w0.254: R14.2 v2(35.96,19.76) ; D3.2 30.58,23.78 v2(30.75,23.95)
  TOP w0.305: U5.12 12.73,20.91 13.23,21.41 13.23,22.05
  TOP w0.508: C16.1 13.61,22.05 13.99,21.67 ; 13.99,21.67 14.37,22.05 L6.1 ; 13.99,21.67 v1(13.99,21.54) ; 23.33,26.29 v1(22.62,27) ; 23.33,26.29 23.33,26.77 23.56,27 25.54,27 25.67,27.13 v2(26.18,27.13) ; 23.33,26.29 U2.5 ; L5.2 v1(28.08,21.54)
  L3PWR w0.102: 10.94,27.26 J3.1 10.89,27.46 ; 12.72,27.26 12.51,27.46
  L3PWR w0.762: 12.51,27.46 10.89,27.46
  BOTTOM w0.381: U1.1 28.24,19.92 28.06,20.1 C1.1
  BOTTOM w0.508: v2(20.46,8.46) 20.95,7.98 C9.1 20.95,6.68 20.97,6.66 L1.1 ; v2(26.18,27.13) 25.32,26.27 C5.1 C4.1 ; v1(28.08,21.54) 28.08,20.68 C1.1 ; R20.2 U4.3 34.52,6.64 v1(34.18,6.3)
  vias: v1(26.19,27.11)
CHRQ: length 19.5
  TOP w0.102: U5.83 18.67,10.27 18.7,10.24 v2(19.45,10.24)
  BOTTOM w0.102: v2(19.45,10.24) 22.24,10.24 24.02,8.46 24.02,5.16 24.78,4.4 28.12,4.4 28.22,4.49 28.71,4.49 28.81,4.4 29.68,4.4 30.8,3.28 ; R15.2 31.89,3.37 30.9,3.37 30.8,3.28 ; 30.8,3.28 U3.1 30.8,2.59
GPS_EN: length 13.4
  TOP w0.102: v2(9.8,5.41) 9.72,5.34 U5.55 ; U7.6 20.52,3.96 R22.2 19.7,4.52 v2(19.32,4.9)
  BOTTOM w0.102: v2(9.8,5.41) 18.81,5.41 v2(19.32,4.9)
INT1: length 6.5
  TOP w0.102: U5.3 17.23,20.72 18.05,21.54 19.41,21.54 19.96,22.08 R26.2 19.59,23.45 19.35,23.68 U8.4
INT2: length 11
  TOP w0.102: R25.2 17.8,27.26 18.05,27.01 ; 18.05,27.01 v2(18.05,27) ; 18.05,27.01 U8.9 ; v2(17.29,19.51) 17.73,19.95 U5.2
  BOTTOM w0.102: v2(17.29,19.51) 17.29,20.65 18.56,21.92 18.56,26.49 v2(18.05,27)
LED_B: length 12.8
  TOP w0.102: 29.35,20.27 R18.2 29.35,19.64 26.49,16.77 U5.96
LED_G: length 13.6
  TOP w0.102: U5.95 26.37,16.27 29.86,19.76 R17.2
LED_R: length 15.4
  TOP w0.102: R16.1 28.72,22.43 28.72,19.38 26.31,16.98 20.58,16.98 20.29,17.27 U5.97
NRESET: length 79
  TOP w0.102: 5.61,25.99 4.59,27 4.59,28.02 5.1,28.53 13.48,28.53 14.24,27.76 v2(25.29,27.76) ; U5.32 7.78,14.77 7.26,15.3 7.26,16.4 5.61,18.05 5.61,22.18 v2(5.99,22.56)
  BOTTOM w0.102: 36.59,5.54 36.59,8.89 36.57,8.92 VC3.2 36.97,9.22 37.74,9.98 38.5,9.98 38.88,10.37 38.88,12.27 39.77,13.16 39.77,16.97 38.88,17.86 38.88,18.75 39.51,19.38 39.51,24.46 36.21,27.76 v2(25.29,27.76) ; 36.59,5.54 35.54,5.54 34.63,4.63 U4.2 ; 36.59,5.54 37.59,5.54 38.49,4.64 SW1.2 ; 5.61,25.99 5.61,22.94 v2(5.99,22.56)
POWER_KEY: length 26.4
  TOP w0.102: D2.1 34.58,25.42 35.45,24.55 35.45,19.38 R14.1 33.16,18.87 31.95,17.66 28.39,17.66 23.51,12.78 18.67,12.78 18.67,12.77 U5.88
POWER_ON: length 15.3
  TOP w0.102: U5.89 18.67,13.27 18.68,13.29 23.73,13.29 29.13,18.68 D1.1
RXD: length 11.3
  TOP w0.102: v2(19.96,12.27) 18.67,12.27 18.67,12.27 U5.87
  BOTTOM w0.102: R5.2 24.66,18.11 24.66,14.94 21.99,12.27 v2(19.96,12.27)
SCL0: length 5.6
  TOP w0.102: U5.100 21.38,18.77 R29.2 22.81,20.2 U9.4
SCL1: length 10.9
  TOP w0.102: U5.20 8.73,20.72 9.42,21.41 10.43,21.41 10.49,21.47 10.49,21.47 10.76,21.74 10.76,21.74 11.37,22.35 11.37,22.61 12.72,23.95 12.84,23.95 R28.2 14.62,24.46 15.64,24.46 16.02,24.84 U8.13 16.91,24.84
SDA0: length 5.8
  TOP w0.102: U5.99 20.43,18.27 R30.2 21.61,18.62 22.12,18.62 22.9,19.4 U9.3
SDA1: length 9.7
  TOP w0.102: U8.14 15.9,24.34 15.64,24.08 14.62,24.08 R27.2 12.59,23.45 11.57,22.43 11.57,22.27 10.96,21.65 10.96,21.65 10.58,21.27 10.57,21.27 10.47,21.16 9.54,21.16 9.23,20.84 U5.19
SWD_CLK: length 15.5
  TOP w0.102: v2(6.49,23.19) 5.86,23.19 5.35,22.68 5.35,18.02 7.05,16.32 7.05,15.22 7.51,14.76 7.51,14.38 7.61,14.27 U5.33
  BOTTOM w0.102: J3.4 9.42,25.58 8.42,24.59 7.89,24.59 v2(6.49,23.19)
SWD_IO: length 17.6
  TOP w0.102: J3.2 10.69,25.58 10.02,24.92 8.47,24.92 8.01,24.46 6.78,24.46 5.1,22.78 5.1,17.99 6.85,16.23 6.85,14.71 7.78,13.77 U5.34
SWDO: length 17.8
  TOP w0.102: U5.38 7.78,11.77 7.38,12.18 7.38,13.85 6.65,14.59 6.65,16.06 4.84,17.86 4.84,22.81 6.7,24.67 7.79,24.67 8.15,25.02 J3.6
TXD: length 13.2
  TOP w0.102: U5.86 20.4,11.77 20.42,11.76 v2(20.72,11.76)
  L2GND w0.102: v2(20.72,11.76) 18.43,11.76
  BOTTOM w0.102: v2(20.72,11.76) 21.99,11.76 25.16,14.94 R4.2
VSYS: length 23.2
  TOP w0.102: R10.1 27.7,24.44 27.05,25.1 ; 6.97,19.77 6.81,19.77 6.8,19.79 ; C12.1 21.09,21.29 20.8,21 20.8,20.96 20.62,20.79 20.34,20.79 R21.2 19.58,20.02 19.45,20.02 19.2,19.77 ; R6.2 27.59,27.11 27.59,25.64 27.05,25.1 ; v2(9.16,19.64) 9.16,19.67 9.06,19.77 U5.22 ; 27.05,25.1 Q1.3 26.31,25.1 26.18,24.97
  TOP w0.305: 21.12,20.83 C12.1 21.12,21.75 ; U5.102 19.2,19.77 ; R21.2 20.08,21.05 ; R21.2 19.56,20.53 ; R21.2 20.6,20.53
  TOP w0.406: v1(6.49,18.87) C20.1 6.95,19.79 6.97,19.77 U5.22
  TOP w0.508: v1(22.24,23.07) 22.72,23.55 U2.1 23.33,23.7 v1(22.62,24.41)
  TOP w0.762: 25.29,24.97 26.18,24.97
  BOTTOM w0.102: v2(9.16,19.64) 9.29,19.64 R23.2
  BOTTOM w0.508: v1(22.24,23.07) 23.39,23.07 23.74,23.43 24.66,23.43 24.77,23.32 C3.1
VUSB_5V: length 13.7
  TOP w0.254: v2(29.23,13.41) 28.97,13.67 R13.1
  BOTTOM w0.102: C26.1 30.09,12.89 30.24,13.05 R3.1 30.12,13.29 ; 36.47,12.91 36.61,13.05 ; 35.2,10.87 35.55,11.23 ; 30.5,11.64 30.09,12.04
  BOTTOM w0.254: R3.1 v2(29.23,13.41)
  BOTTOM w0.305: R3.1 30.74,13.91 U1.19 ; 27.54,5.41 C7.1 26.89,6.02 ; 28.92,6.02 U3.4 28.36,5.31 ; 30.12,12.4 30.12,13.29
  BOTTOM w0.457: 35.55,11.23 C27.1 ; 36.61,13.05 J1.1 ; 30.09,12.04 C26.1
N97219341: length 4.8
  TOP w0.203: U7.2 22.24,3.25 v2(21.99,3)
  BOTTOM w0.203: C11.1 22.42,3.13 22.29,3 v2(21.99,3)
  BOTTOM w0.508: C11.1 C10.1 21.99,4.4 21.47,4.91 L1.2
N97219363: length 3.9
  BOTTOM w0.102: VC1.2 34.69,15.7 R7.1 36.04,14.35 J1.3
N97219365: length 3.3
  BOTTOM w0.102: J1.2 36.17,13.7 35.95,13.92 R8.1 35.58,13.55 35.55,13.53 VC2.2
N97219367: length 3.1
  BOTTOM w0.102: R8.2 33.55,14.94 33.55,15.19 33.02,15.72 U1.15
N97219373: length 2.8
  BOTTOM w0.102: R7.2 33.15,16.22 U1.14
N97219417: length 1.8
  TOP w0.102: U5.13 12.23,19.83 12.21,19.81 v2(12.21,19.64)
  BOTTOM w0.102: v2(12.21,19.64) 12,19.42 11.87,19.42 11.7,19.26 C17.1
N97219583: length 25.1
  TOP w0.102: 15,25.1 15.77,25.1 16.01,25.34 ; 19.89,24.59 19.7,24.59
  TOP w0.254: 15.14,26.24 v1(16.15,26.24)
  TOP w0.305: C23.1 15.14,26.24 16.16,27.26 R25.1 ; 19.17,26.01 19.27,26.01 19.58,25.7 19.58,24.72 19.7,24.59 ; v1(16.02,23.45) 15,23.45
  TOP w0.381: R26.1 20.76,23.66 20.75,23.7 20.71,23.75 20.24,24.23 C24.1 19.89,24.59 19.65,24.34 U8.5 ; 15.03,25.07 15.61,25.07 15.88,25.34 U8.12 ; U8.8 19.17,26.01 19.17,26.6 v1(19.32,26.75) ; L6.2 16.65,23.28 16.76,23.39 16.88,23.39 17.05,23.55 U8.1
  TOP w0.508: L6.2 C25.1 ; C23.1 15.1,25.94 15,25.83 15,25.1 ; U8.1 16.25,23.68 v1(16.02,23.45)
  L3PWR w0.508: v1(16.02,23.45) 16.02,25.66 16.15,25.79 v1(16.15,26.24) 16.27,26.11 18.69,26.11 v1(19.32,26.75)
N97219715: length 4.3
  TOP w0.203: U5.61 12.73,4.04 arc(12.6,3.44) 12.26,2.93 arc(11.64,2.51) 10.91,2.36 J4.1
N97219761: length 8.5
  TOP w0.203: C19.1 6.19,4.78 6.19,4.77 L4.2 6.24,8.15 arc(6.09,8.91) 5.66,9.54 arc(5.23,9.83) 4.73,9.93 DVI1.1
N97219817: length 8.4
  BOTTOM w0.102: U1.2 28.74,21.78 28.37,22.14 26.78,22.14 26.05,21.41 26.05,19.12 26.18,18.99 R5.1
N97219819: length 1.4
  BOTTOM w0.102: U1.30 27.18,17.72 27.17,17.73 R4.1
N97219843: length 3.8
  TOP w0.203: 7.62,2.36 7.14,2.36 arc(6.78,2.44) 6.47,2.64 6.47,2.64 arc(6.3,2.9) 6.24,3.2 L4.1 6.19,3.77 6.19,3.76 C18.1
N97219851: length 2.2
  BOTTOM w0.102: U1.16 32.39,15.03 33.27,14.15 C2.1
N97219873: length 3.1
  BOTTOM w0.102: R2.1 R3.2 31.26,13.78 ; 31.26,13.78 31.26,14.68 ; 31.26,13.78 31.24,13.8 U1.18
N97219883: length 2.5
  TOP w0.203: U5.67 15.73,3.2 arc(15.81,2.76) 16.07,2.38 16.08,2.36 L2.1
N97220028: length 2.9
  TOP w0.102: U5.23 8.63,19.27 v2(8.91,19)
  BOTTOM w0.102: R24.1 R23.1 v2(8.91,19)
N97220114: length 1.9
  TOP w0.102: U2.3 25.21,23.4 25.93,22.68 26.69,22.68
N97220138: length 2
  TOP w0.203: U6.1 22,2.49 arc(22.22,2.54) 22.41,2.66 22.42,2.66 arc(22.58,2.92) 22.64,3.21 U7.3
N97220140: length 34.3
  TOP w0.102: v1(20.21,27.13) 20.21,26.57 20.24,26.55
  TOP w0.254: U5.49 8.62,6.27 8.72,6.17 v2(9.03,6.17) ; v2(10.3,21.92) 9.74,21.92 D4.A4
  TOP w0.381: C21.1 20.24,27.1
  L3PWR w0.381: v2(10.3,21.92) 11.19,21.92 11.97,22.7 17.18,22.7 20.21,25.73 v1(20.21,27.13)
  BOTTOM w0.254: v2(10.3,21.92) 10.56,21.67 10.56,7.7 v2(9.03,6.17)
  BOTTOM w0.381: v1(20.21,27.13) 20.21,26.42 19.88,26.09 J2.C1
N97220176: length 14.7
  TOP w0.102: R29.1 22.37,20.27 22.88,20.78 24.55,20.78 24.66,20.88 24.66,21.31 C22.1 ; U9.2 22.6,18.6 R30.1
  TOP w0.381: C22.1 L5.1 26.19,20.66 U9.5 U9.6 24.55,19.4 23.75,18.6 U9.2 23.35,18.62 24.02,18.62 24.84,17.8 U9.8
N97220212: length 2.6
  TOP w0.203: C15.1 C13.1 18.15,1.98 arc(18.06,2) 17.98,2.06 17.73,2.31 arc(17.66,2.35) 17.59,2.36 L2.2
N97220241: length 1.5
  BOTTOM w0.102: R19.1 31.87,5.31 U3.5
N97220339: length 6.8
  TOP w0.102: SW2.2 SW2.1 32.19,24.85 D2.3
N97220404: length 4.8
  TOP w0.102: D2.2 35.14,27.32 35.21,27.38 35.96,27.38 37.86,25.48 R12.2
N97220416: length 15.1
  TOP w0.102: Q2.3 R12.1 37.23,24.59 37.23,25.48 36.21,26.49 33.55,26.49 33.29,26.75 33.29,27.26 33.16,27.38 31.36,27.38 31.26,27.28 31.26,27.26 31.13,27.13 31.13,25.61 R9.2 30.5,24.34 30.3,24.15 Q1.1
N97220523: length 16.9
  TOP w0.102: v2(7.11,22.55) 7.11,23.06 7.62,23.56 D4.C1 ; U5.43 7.78,9.27 7.73,9.22 v2(7.26,9.22)
  BOTTOM w0.102: v2(7.11,22.55) 7.11,21.81 7.51,21.41 7.51,20.65 7.64,20.53 7.64,9.6 v2(7.26,9.22)
N97220535: length 17.4
  TOP w0.102: v2(7.64,22.94) 7.76,23.06 D4.C2 ; U5.46 7.78,7.77 7.73,7.83 v2(7.38,7.83)
  BOTTOM w0.102: v2(7.38,7.83) 7.89,8.33 7.89,20.65 7.76,20.78 7.76,21.66 7.56,21.86 7.56,22.24 7.64,22.31 v2(7.64,22.94)
N97220539: length 17.4
  TOP w0.102: U5.48 8.74,6.77 v2(9.03,7.06) ; v2(8.02,22.05) 8.53,22.56 D4.C3
  BOTTOM w0.102: v2(9.03,7.06) 8.15,7.95 8.15,20.78 8.02,20.91 v2(8.02,22.05)
N97220553: length 8.9
  TOP w0.102: D4.A1 11.18,23.56 v2(11.32,23.7)
  BOTTOM w0.102: J2.C2 16.09,25.55 14.06,23.52 12.41,23.52 12.32,23.43 11.59,23.43 v2(11.32,23.7)
N97220566: length 7.5
  TOP w0.102: D4.A2 10.76,23.06 10.8,23.02 v2(11.11,23.02)
  BOTTOM w0.102: J2.C3 14.18,25.55 12.97,24.34 11.31,24.34 10.69,23.71 10.69,23.45 11.11,23.03 v2(11.11,23.02)
N97220568: length 5.9
  TOP w0.102: v2(10.56,22.56) D4.A3
  BOTTOM w0.102: J2.C7 14.4,22.38 14.11,22.66 14.11,22.81 14.01,22.91 11.68,22.91 11.11,22.35 10.77,22.35 v2(10.56,22.56)
N97220738: length 9.2
  TOP w0.102: D1.3 34.05,17.73 34.43,18.11 36.34,18.11 R11.1 37.1,19.24 36.91,19.43 Q2.1 36.91,20.51 36.34,21.08 C6.1
N97220790: length 1.2
  TOP w0.203: U6.4 20.18,2.19 arc(19.99,2.15) 19.83,2.04 arc(19.76,2) 19.68,1.98 C13.2
N97220884: length 14.1
  TOP w0.102: 38.63,10.62 38.75,10.5 ; 38.88,17.86 39.22,18.2
  TOP w0.305: 37.6,10.67 J1.6 ; J1.6 38.31,11.6 ; J1.6 36.9,11.6 ; J1.6 37.6,12.52 ; J1.9 38.31,17.1 ; J1.9 37.6,18.02 ; J1.9 37.6,16.17
  TOP w0.508: R1.1 36.8,17.35 37.05,17.1 J1.9
  TOP w0.762: 39.22,18.2 J1.8 ; 38.75,10.5 J1.7
  BOTTOM w0.305: 38.31,17.1 J1.9 37.6,18.02 ; 37.6,10.67 J1.6 38.31,11.6
  vias: v2(40.4,16.84) v2(40.4,15.32) v2(40.4,13.92) v2(40.4,12.27)
N97220965: length 1.5
  TOP w0.102: D1.2 30.42,16.78 30.36,16.84 R13.2
N97221136: length 1
  TOP w0.203: L3.1 22.37,4.54 22.24,4.41 U7.5
N97221138: length 1.4
  TOP w0.203: L3.2 C14.1
N97221234: length 7.5
  TOP w0.203: C14.2 27.34,8.31 ANT1.1
N97221374: length 1.8
  TOP w0.102: R21.1 19.71,19.51 19.48,19.27 U5.101
N97235316: length 2.6
  TOP w0.102: D3.1 31.13,22.5 31.13,22.15 31.03,22.05 R16.2
N97235326: length 1.6
  TOP w0.102: R17.1 31.51,20.13 31.43,20.22 D3.4
N97235328: length 1.3
  TOP w0.102: 29.35,21.16 29.72,21.16 29.86,21.3 D3.3

## Copper pours and planes (outline as drawn; the poured copper is in the pictures)
GND on TOP: 5.22,28.78 5.22,18.11 6.88,15.83 6.88,13.92 4.84,13.92 4.84,6.05 2.3,6.05 2.3,3.25 5.35,0.21 36.34,0.21 40.78,4.65 40.78,24.34 36.34,28.78 ; 11 cut-outs
GND on BOTTOM: 4.59,28.78 4.59,20.14 5.22,19.51 5.22,0.21 36.21,0.21 40.78,4.78 40.78,24.08 36.09,28.78 ; 3 cut-outs
GND on L2GND: 4.84,28.78 4.84,0.33 36.34,0.21 40.78,4.65 40.78,24.34 36.34,28.78
VBAT on BOTTOM: 24.66,3.89 24.66,2.62 24.4,2.36 24.4,1.48 24.53,1.35 28.97,1.35 29.35,1.73 29.35,3.76 28.97,4.14 24.91,4.14
VBAT on L3PWR: 28.08,25.61 28.21,25.48 30.75,25.48 30.88,25.61 35.96,25.61 37.61,23.95 37.61,7.83 34.05,4.27 25.54,4.27 25.54,0.46 36.85,0.46 40.15,4.78 40.15,23.95 36.21,28.4 28.08,28.4
VDD_3V on L3PWR: 4.84,28.53 4.84,3.25 7.38,0.46 36.85,0.46 37.36,0.97 37.36,27.26 36.21,28.4 ; 7 cut-outs
VSYS on TOP: 27.58,25.73 26.18,25.73 25.8,25.35 22.75,25.35 21.73,24.34 21.73,23.45 18.94,20.65 18.94,20.02 18.81,19.89 18.43,19.89 18.43,19.64 19.45,19.64 19.96,20.14 20.72,20.14 21.48,20.91 21.48,21.8 22.62,22.94 23.64,22.94 23.64,24.21 23.89,24.46 27.58,24.46
VSYS on L3PWR: 5.73,19.51 5.73,18.37 5.86,18.24 18.43,18.24 23.39,23.19 23.39,24.72 22.88,25.22 21.48,25.22 21.48,22.81 18.18,19.51
VUSB_5V on BOTTOM: 26.31,7.19 26.31,4.9 26.43,4.78 29.35,4.78 29.35,5.79 29.74,6.17 32.53,6.17 34.43,8.08 34.43,10.24 34.69,10.49 35.83,10.49 36.59,11.25 36.59,12.4 37.1,12.91 37.1,13.29 36.59,13.29 36.21,12.91 36.21,12.27 35.96,12.02 35.2,12.02 35.2,11.25 35.07,11.13 31.39,11.13 30.5,12.02 30.5,13.79 29.86,13.79 29.74,13.67 29.74,12.02 32.53,9.22 32.53,7.7 31.77,6.94 28.08,6.94 27.58,7.44 26.56,7.44
N97220884 on TOP: 36.72,18.75 36.72,9.98 37.36,9.35 39.77,9.35 40.78,9.86 40.78,18.87 40.02,19.26 37.23,19.26
N97220884 on BOTTOM: 36.85,18.11 36.85,16.46 36.97,16.33 38.63,16.33 38.75,16.21 38.75,12.65 38.5,12.4 36.97,12.4 36.97,10.87 37.99,9.86 40.78,9.86 40.78,19 37.74,19

## Text on the board
Ref Des/Silkscreen Bottom: BAT+ | BAT-
Ref Des/Silkscreen Top: IoTracker_V0.1 | 2019-06-29
DIMENSION: 29.0mm | 41.0mm
DISPLAY_BOTTOM: FIGURE | SIZE | 11.81 | 19.69 | 28.0 | 39.37 | 47.24 | 31.5 | 47.24x31.49 | 61.02x17.71 | DRILL CHART: TOP to BOTTOM | ALL UNITS ARE IN MILS | TOLERANCE | +0.0/-0.0 | +2.0/-2.0 | PLATED | NON-PLATED | QTY | 263 | 39 | 10 | 3 | 1 | 2
